# EAGLE board Qwiic_TMP117-Panel (EAGLE 9.3.0), part 1 of 2
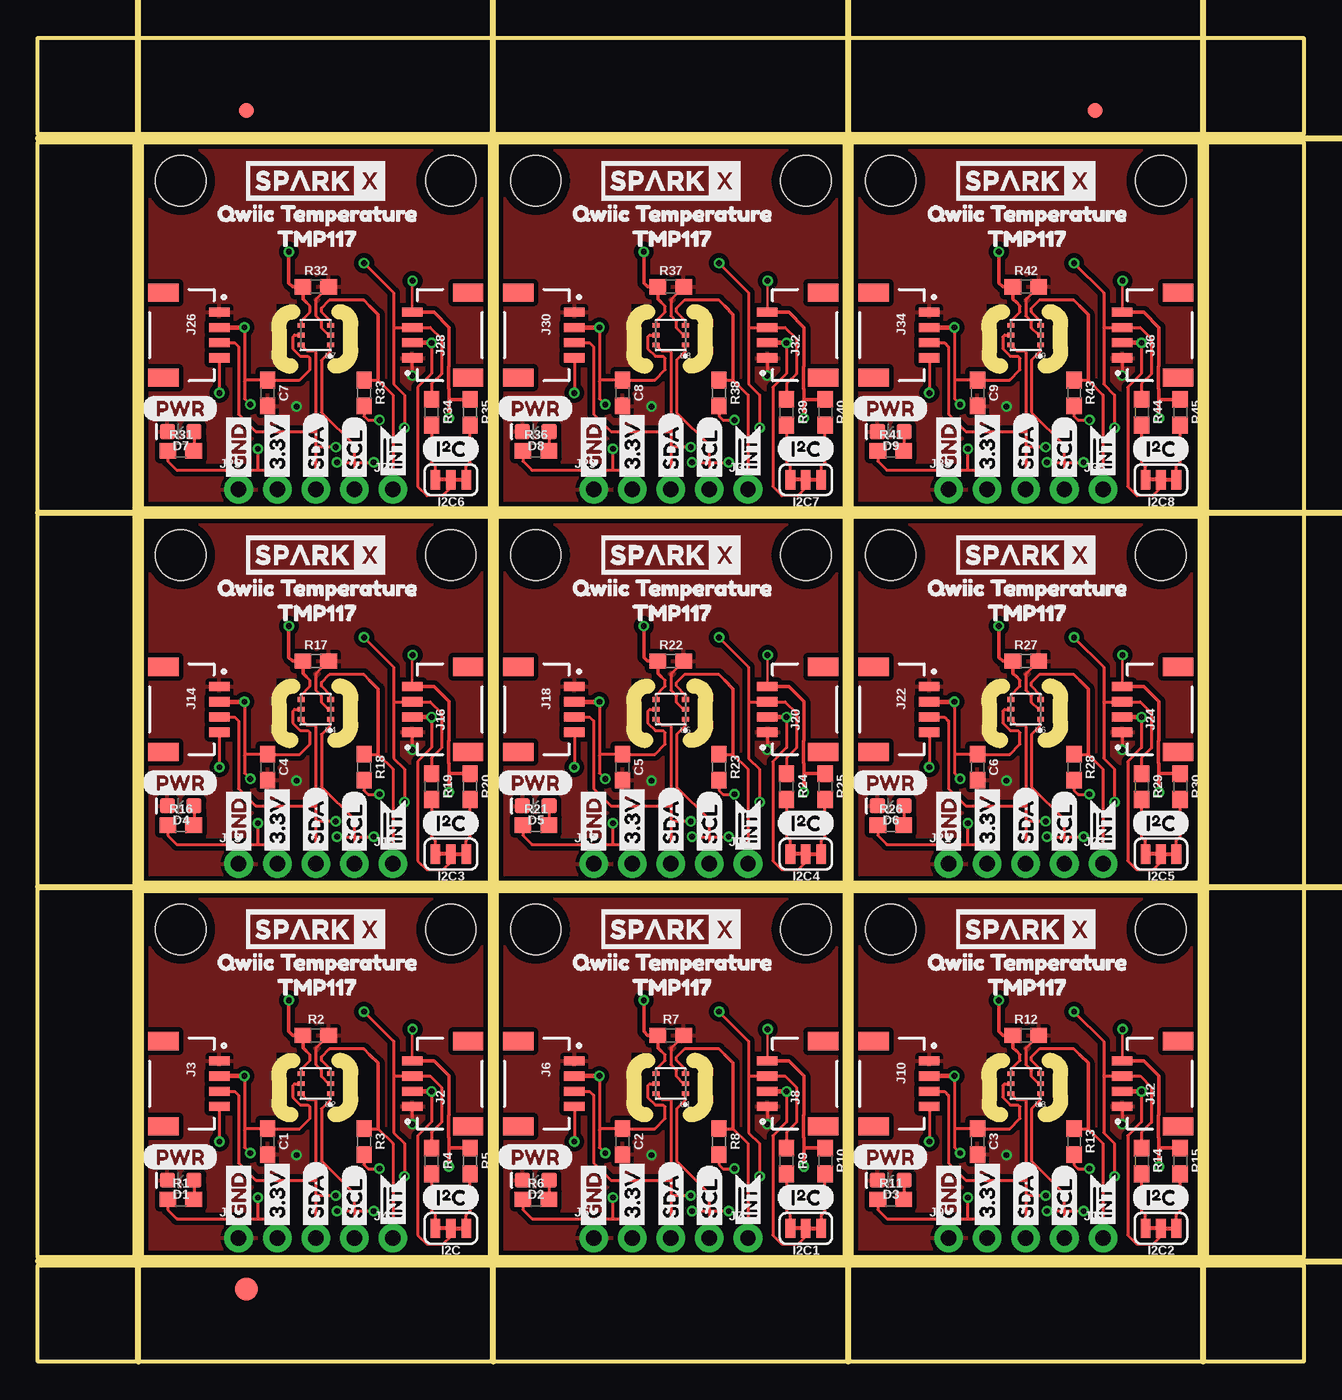
[diagram p0: board, top side]
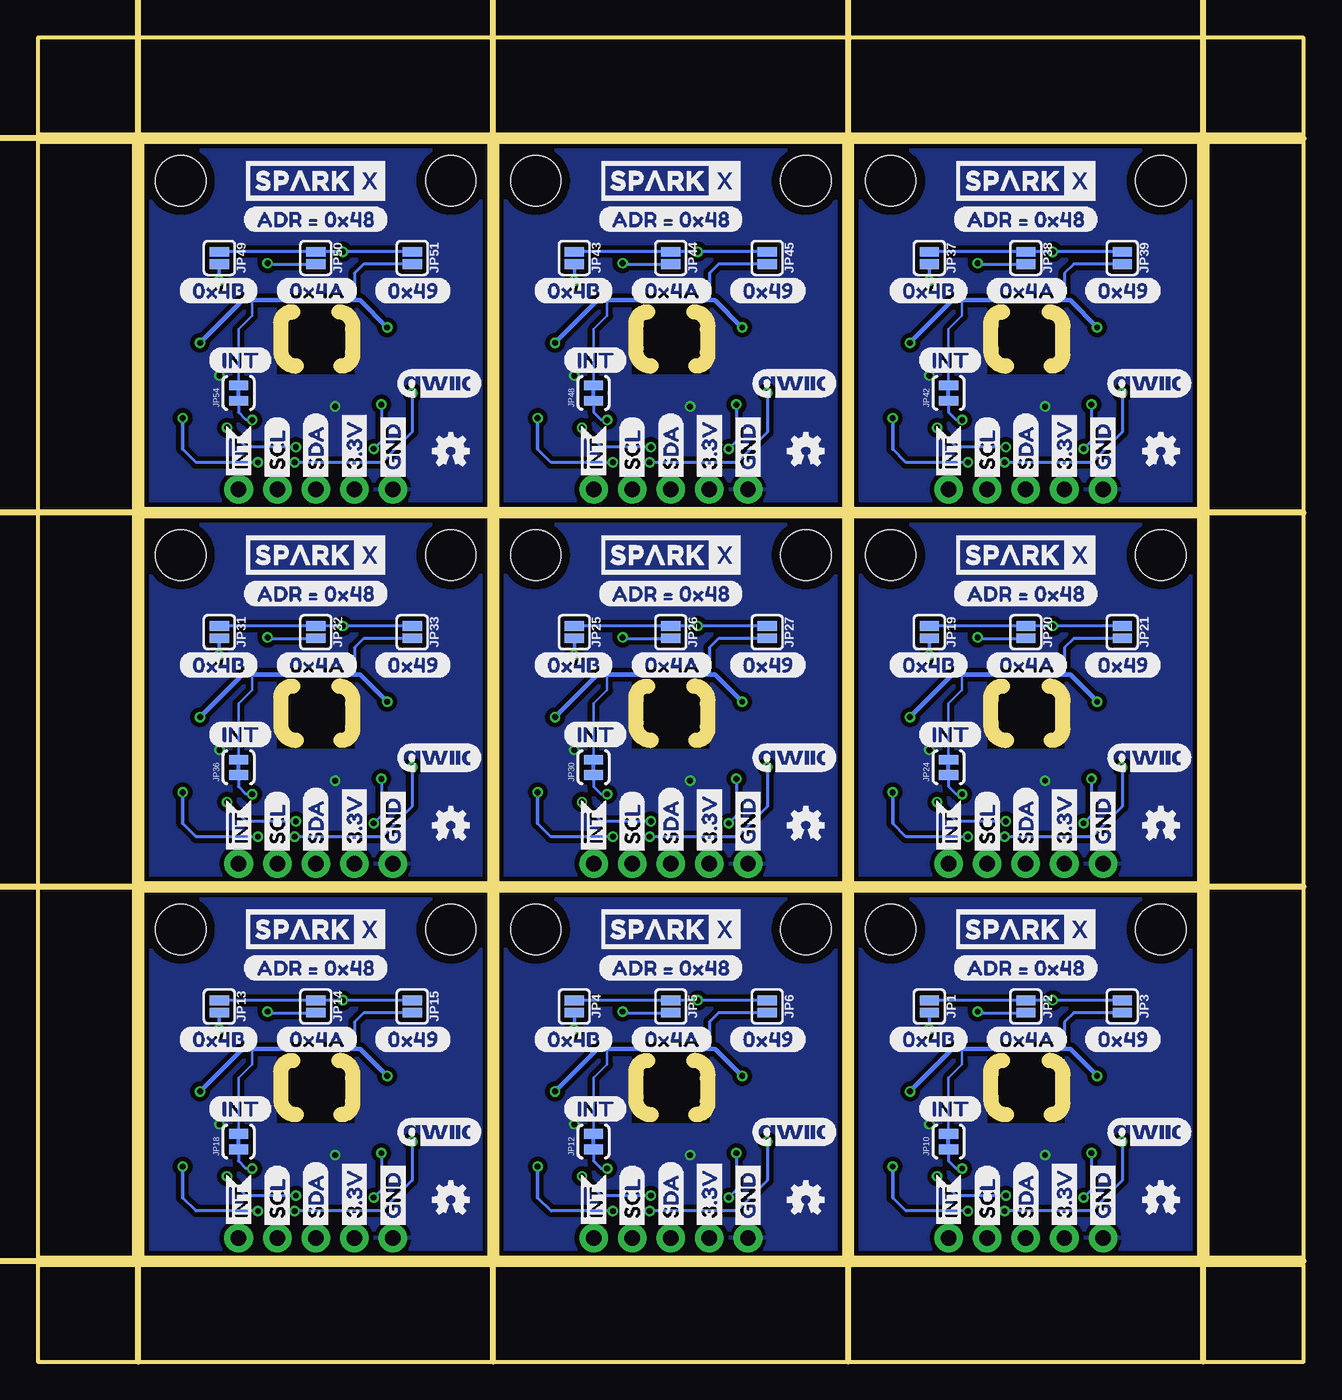
[diagram p1: board, bottom side, seen from below]

Size 83.31 x 87.12 mm. Coordinates in mm from the lower left corner, seen from the top.
Outline: 6.86,6.86 6.86,30.99 29.72,30.99 29.72,6.86 6.86,6.86
Outline: 30.23,6.86 30.23,30.99 53.09,30.99 53.09,6.86 30.23,6.86
Outline: 53.59,6.86 53.59,30.99 76.45,30.99 76.45,6.86 53.59,6.86
Outline: 6.86,31.5 6.86,55.63 29.72,55.63 29.72,31.5 6.86,31.5
Outline: 30.23,31.5 30.23,55.63 53.09,55.63 53.09,31.5 30.23,31.5
Outline: 53.59,31.5 53.59,55.63 76.45,55.63 76.45,31.5 53.59,31.5
Outline: 6.86,56.13 6.86,80.26 29.72,80.26 29.72,56.13 6.86,56.13
Outline: 30.23,56.13 30.23,80.26 53.09,80.26 53.09,56.13 30.23,56.13
Outline: 53.59,56.13 53.59,80.26 76.45,80.26 76.45,56.13 53.59,56.13
Outline: 0,6.35 83.31,6.35 83.31,0 0,0 0,6.35
Outline: 76.96,80.26 83.31,80.26 83.31,6.86 76.96,6.86 76.96,80.26
Outline: 0,87.12 83.31,87.12 83.31,80.77 0,80.77 0,87.12
Outline: 0,80.26 6.35,80.26 6.35,6.86 0,6.86 0,80.26
Copper layers (1*16): Top 0.035mm / dielectric 1.5mm / Bottom 0.035mm
Design rules "SparkFun-2-layer-PCBWay-LIMIT": minimum track width 6mil, minimum drill 0.3mm, track to track 6mil, track to pad 6mil, pad to pad 6mil, via to via 6mil, smd to smd 6mil, copper to edge 6mil, drill to drill 6mil, minimum pad ring 6mil, minimum via ring 6mil, stop-mask expansion 4mil, vias tented up to drill 25mil, thermal gap 10mil
Milling: 98 lines

## Footprints (pad centres in the part's own frame; a part is rotated, then mirrored left to right if it is on the bottom)
0603 = smd 1.1 x 1: 1 -0.85,0; 2 0.85,0
LED-0603 = smd 1 x 1: A -0.877,0; C 0.877,0
FIDUCIAL-1X2 = smd 1 x 1: 1 0,0
FIDUCIAL-1.5X3 = smd 1.5 x 1.5: 1 0,0
SMT-JUMPER_3_2-NC_TRACE_SILK = smd 0.635 x 1.27: 1 -1.016,0; 2 0,0; 3 1.016,0
1X04_NO_SILK = drill 1.016 pad 1.88: 1 0,0; 2 2.54,0; 3 5.08,0; 4 7.62,0
JST04_1MM_RA = smd 0.6 x 1.35: 1 -1.5,0; 2 -0.5,0; 3 0.5,0; 4 1.5,0 | smd 1.2 x 2: NC1 2.8,-3.675; NC2 -2.8,-3.675
1X01_NO_SILK = drill 1.016 pad 1.88: 1 0,0
SMT-JUMPER_2_NO_SILK = smd 0.635 x 1.27: 1 -0.406,0; 2 0.406,0
STAND-OFF = hole 3.302: 0,0
PAD-JUMPER-2-NC_BY_TRACE_YES_SILK = smd 0.635 x 1.27: 1 -0.508,0; 2 0.508,0
TMP117 = smd 0.45 x 0.3: 1 -0.975,0.65; 2 -0.975,0; 3 -0.975,-0.65; 4 0.975,-0.65; 5 0.975,0; 6 0.975,0.65

## Placement (x,y rotation side)
C1  0.1uF  [0603]  15.11,14.48 270 top
C2  0.1uF  [0603]  38.48,14.48 270 top
C3  0.1uF  [0603]  61.85,14.48 270 top
C4  0.1uF  [0603]  15.11,39.12 270 top
C5  0.1uF  [0603]  38.48,39.12 270 top
C6  0.1uF  [0603]  61.85,39.12 270 top
C7  0.1uF  [0603]  15.11,63.75 270 top
C8  0.1uF  [0603]  38.48,63.75 270 top
C9  0.1uF  [0603]  61.85,63.75 270 top
D1  RED  [LED-0603]  9.4,11.94 180 top
D2  RED  [LED-0603]  32.77,11.94 180 top
D3  RED  [LED-0603]  56.13,11.94 180 top
D4  RED  [LED-0603]  9.4,36.58 180 top
D5  RED  [LED-0603]  32.77,36.58 180 top
D6  RED  [LED-0603]  56.13,36.58 180 top
D7  RED  [LED-0603]  9.4,61.21 180 top
D8  RED  [LED-0603]  32.77,61.21 180 top
D9  RED  [LED-0603]  56.13,61.21 180 top
E$1  [FIDUCIAL-1X2]  13.72,82.36 0 top
E$2  [FIDUCIAL-1X2]  69.6,82.36 0 top
E$3  [FIDUCIAL-1.5X3]  13.72,4.76 0 top
I2C  [SMT-JUMPER_3_2-NC_TRACE_SILK]  27.18,8.76 180 top
I2C1  [SMT-JUMPER_3_2-NC_TRACE_SILK]  50.55,8.76 180 top
I2C2  [SMT-JUMPER_3_2-NC_TRACE_SILK]  73.91,8.76 180 top
I2C3  [SMT-JUMPER_3_2-NC_TRACE_SILK]  27.18,33.4 180 top
I2C4  [SMT-JUMPER_3_2-NC_TRACE_SILK]  50.55,33.4 180 top
I2C5  [SMT-JUMPER_3_2-NC_TRACE_SILK]  73.91,33.4 180 top
I2C6  [SMT-JUMPER_3_2-NC_TRACE_SILK]  27.18,58.04 180 top
I2C7  [SMT-JUMPER_3_2-NC_TRACE_SILK]  50.55,58.04 180 top
I2C8  [SMT-JUMPER_3_2-NC_TRACE_SILK]  73.91,58.04 180 top
J1  PTH  [1X04_NO_SILK]  13.21,8.13 0 top
J2  [JST04_1MM_RA]  24.64,18.29 90 top
J3  [JST04_1MM_RA]  11.94,18.29 270 top
J4  [1X01_NO_SILK]  23.37,8.13 0 top
J5  PTH  [1X04_NO_SILK]  36.58,8.13 0 top
J6  [JST04_1MM_RA]  35.31,18.29 270 top
J7  [1X01_NO_SILK]  46.74,8.13 0 top
J8  [JST04_1MM_RA]  48.01,18.29 90 top
J9  PTH  [1X04_NO_SILK]  59.94,8.13 0 top
J10  [JST04_1MM_RA]  58.67,18.29 270 top
J11  [1X01_NO_SILK]  70.1,8.13 0 top
J12  [JST04_1MM_RA]  71.37,18.29 90 top
J13  PTH  [1X04_NO_SILK]  13.21,32.77 0 top
J14  [JST04_1MM_RA]  11.94,42.93 270 top
J15  [1X01_NO_SILK]  23.37,32.77 0 top
J16  [JST04_1MM_RA]  24.64,42.93 90 top
J17  PTH  [1X04_NO_SILK]  36.58,32.77 0 top
J18  [JST04_1MM_RA]  35.31,42.93 270 top
J19  [1X01_NO_SILK]  46.74,32.77 0 top
J20  [JST04_1MM_RA]  48.01,42.93 90 top
J21  PTH  [1X04_NO_SILK]  59.94,32.77 0 top
J22  [JST04_1MM_RA]  58.67,42.93 270 top
J23  [1X01_NO_SILK]  70.1,32.77 0 top
J24  [JST04_1MM_RA]  71.37,42.93 90 top
J25  PTH  [1X04_NO_SILK]  13.21,57.4 0 top
J26  [JST04_1MM_RA]  11.94,67.56 270 top
J27  [1X01_NO_SILK]  23.37,57.4 0 top
J28  [JST04_1MM_RA]  24.64,67.56 90 top
J29  PTH  [1X04_NO_SILK]  36.58,57.4 0 top
J30  [JST04_1MM_RA]  35.31,67.56 270 top
J31  [1X01_NO_SILK]  46.74,57.4 0 top
J32  [JST04_1MM_RA]  48.01,67.56 90 top
J33  PTH  [1X04_NO_SILK]  59.94,57.4 0 top
J34  [JST04_1MM_RA]  58.67,67.56 270 top
J35  [1X01_NO_SILK]  70.1,57.4 0 top
J36  [JST04_1MM_RA]  71.37,67.56 90 top
JP1  [SMT-JUMPER_2_NO_SILK]  24.64,23.37 270 bottom
JP2  [SMT-JUMPER_2_NO_SILK]  18.29,23.37 270 bottom
JP3  [SMT-JUMPER_2_NO_SILK]  11.94,23.37 270 bottom
JP4  [SMT-JUMPER_2_NO_SILK]  48.01,23.37 270 bottom
JP5  [SMT-JUMPER_2_NO_SILK]  41.66,23.37 270 bottom
JP6  [SMT-JUMPER_2_NO_SILK]  35.31,23.37 270 bottom
JP7  STAND-OFF  [STAND-OFF]  50.55,28.45 0 top
JP8  STAND-OFF  [STAND-OFF]  27.18,28.45 0 top
JP9  STAND-OFF  [STAND-OFF]  9.4,28.45 0 top
JP10  INT  [PAD-JUMPER-2-NC_BY_TRACE_YES_SILK]  23.37,14.48 90 bottom
JP11  STAND-OFF  [STAND-OFF]  32.77,28.45 0 top
JP12  INT  [PAD-JUMPER-2-NC_BY_TRACE_YES_SILK]  46.74,14.48 90 bottom
JP13  [SMT-JUMPER_2_NO_SILK]  71.37,23.37 270 bottom
JP14  [SMT-JUMPER_2_NO_SILK]  65.02,23.37 270 bottom
JP15  [SMT-JUMPER_2_NO_SILK]  58.67,23.37 270 bottom
JP16  STAND-OFF  [STAND-OFF]  73.91,28.45 0 top
JP17  STAND-OFF  [STAND-OFF]  56.13,28.45 0 top
JP18  INT  [PAD-JUMPER-2-NC_BY_TRACE_YES_SILK]  70.1,14.48 90 bottom
JP19  [SMT-JUMPER_2_NO_SILK]  24.64,48.01 270 bottom
JP20  [SMT-JUMPER_2_NO_SILK]  18.29,48.01 270 bottom
JP21  [SMT-JUMPER_2_NO_SILK]  11.94,48.01 270 bottom
JP22  STAND-OFF  [STAND-OFF]  27.18,53.09 0 top
JP23  STAND-OFF  [STAND-OFF]  9.4,53.09 0 top
JP24  INT  [PAD-JUMPER-2-NC_BY_TRACE_YES_SILK]  23.37,39.12 90 bottom
JP25  [SMT-JUMPER_2_NO_SILK]  48.01,48.01 270 bottom
JP26  [SMT-JUMPER_2_NO_SILK]  41.66,48.01 270 bottom
JP27  [SMT-JUMPER_2_NO_SILK]  35.31,48.01 270 bottom
JP28  STAND-OFF  [STAND-OFF]  50.55,53.09 0 top
JP29  STAND-OFF  [STAND-OFF]  32.77,53.09 0 top
JP30  INT  [PAD-JUMPER-2-NC_BY_TRACE_YES_SILK]  46.74,39.12 90 bottom
JP31  [SMT-JUMPER_2_NO_SILK]  71.37,48.01 270 bottom
JP32  [SMT-JUMPER_2_NO_SILK]  65.02,48.01 270 bottom
JP33  [SMT-JUMPER_2_NO_SILK]  58.67,48.01 270 bottom
JP34  STAND-OFF  [STAND-OFF]  73.91,53.09 0 top
JP35  STAND-OFF  [STAND-OFF]  56.13,53.09 0 top
JP36  INT  [PAD-JUMPER-2-NC_BY_TRACE_YES_SILK]  70.1,39.12 90 bottom
JP37  [SMT-JUMPER_2_NO_SILK]  24.64,72.64 270 bottom
JP38  [SMT-JUMPER_2_NO_SILK]  18.29,72.64 270 bottom
JP39  [SMT-JUMPER_2_NO_SILK]  11.94,72.64 270 bottom
JP40  STAND-OFF  [STAND-OFF]  27.18,77.72 0 top
JP41  STAND-OFF  [STAND-OFF]  9.4,77.72 0 top
JP42  INT  [PAD-JUMPER-2-NC_BY_TRACE_YES_SILK]  23.37,63.75 90 bottom
JP43  [SMT-JUMPER_2_NO_SILK]  48.01,72.64 270 bottom
JP44  [SMT-JUMPER_2_NO_SILK]  41.66,72.64 270 bottom
JP45  [SMT-JUMPER_2_NO_SILK]  35.31,72.64 270 bottom
JP46  STAND-OFF  [STAND-OFF]  50.55,77.72 0 top
JP47  STAND-OFF  [STAND-OFF]  32.77,77.72 0 top
JP48  INT  [PAD-JUMPER-2-NC_BY_TRACE_YES_SILK]  46.74,63.75 90 bottom
JP49  [SMT-JUMPER_2_NO_SILK]  71.37,72.64 270 bottom
JP50  [SMT-JUMPER_2_NO_SILK]  65.02,72.64 270 bottom
JP51  [SMT-JUMPER_2_NO_SILK]  58.67,72.64 270 bottom
JP52  STAND-OFF  [STAND-OFF]  73.91,77.72 0 top
JP53  STAND-OFF  [STAND-OFF]  56.13,77.72 0 top
JP54  INT  [PAD-JUMPER-2-NC_BY_TRACE_YES_SILK]  70.1,63.75 90 bottom
LOGO1  OSHW-LOGOMINI  [OSHW-LOGO-MINI]  9.4,10.67 0 bottom
LOGO2  OSHW-LOGOMINI  [OSHW-LOGO-MINI]  32.77,10.67 0 bottom
LOGO3  OSHW-LOGOMINI  [OSHW-LOGO-MINI]  56.13,10.67 0 bottom
LOGO4  OSHW-LOGOMINI  [OSHW-LOGO-MINI]  9.4,35.31 0 bottom
LOGO5  OSHW-LOGOMINI  [OSHW-LOGO-MINI]  32.77,35.31 0 bottom
LOGO6  OSHW-LOGOMINI  [OSHW-LOGO-MINI]  56.13,35.31 0 bottom
LOGO7  OSHW-LOGOMINI  [OSHW-LOGO-MINI]  9.4,59.94 0 bottom
LOGO8  OSHW-LOGOMINI  [OSHW-LOGO-MINI]  32.77,59.94 0 bottom
LOGO9  OSHW-LOGOMINI  [OSHW-LOGO-MINI]  56.13,59.94 0 bottom
R1  1k  [0603]  9.4,10.67 0 top
R2  10k  [0603]  18.29,21.46 0 top
R3  10k  [0603]  21.46,14.48 270 top
R4  2.2k  [0603]  25.91,13.21 270 top
R5  2.2k  [0603]  28.45,13.21 270 top
R6  1k  [0603]  32.77,10.67 0 top
R7  10k  [0603]  41.66,21.46 0 top
R8  10k  [0603]  44.83,14.48 270 top
R9  2.2k  [0603]  49.28,13.21 270 top
R10  2.2k  [0603]  51.82,13.21 270 top
R11  1k  [0603]  56.13,10.67 0 top
R12  10k  [0603]  65.02,21.46 0 top
R13  10k  [0603]  68.2,14.48 270 top
R14  2.2k  [0603]  72.64,13.21 270 top
R15  2.2k  [0603]  75.18,13.21 270 top
R16  1k  [0603]  9.4,35.31 0 top
R17  10k  [0603]  18.29,46.1 0 top
R18  10k  [0603]  21.46,39.12 270 top
R19  2.2k  [0603]  25.91,37.85 270 top
R20  2.2k  [0603]  28.45,37.85 270 top
R21  1k  [0603]  32.77,35.31 0 top
R22  10k  [0603]  41.66,46.1 0 top
R23  10k  [0603]  44.83,39.12 270 top
R24  2.2k  [0603]  49.28,37.85 270 top
R25  2.2k  [0603]  51.82,37.85 270 top
R26  1k  [0603]  56.13,35.31 0 top
R27  10k  [0603]  65.02,46.1 0 top
R28  10k  [0603]  68.2,39.12 270 top
R29  2.2k  [0603]  72.64,37.85 270 top
R30  2.2k  [0603]  75.18,37.85 270 top
R31  1k  [0603]  9.4,59.94 0 top
R32  10k  [0603]  18.29,70.74 0 top
R33  10k  [0603]  21.46,63.75 270 top
R34  2.2k  [0603]  25.91,62.48 270 top
R35  2.2k  [0603]  28.45,62.48 270 top
R36  1k  [0603]  32.77,59.94 0 top
R37  10k  [0603]  41.66,70.74 0 top
R38  10k  [0603]  44.83,63.75 270 top
R39  2.2k  [0603]  49.28,62.48 270 top
R40  2.2k  [0603]  51.82,62.48 270 top
R41  1k  [0603]  56.13,59.94 0 top
R42  10k  [0603]  65.02,70.74 0 top
R43  10k  [0603]  68.2,63.75 270 top
R44  2.2k  [0603]  72.64,62.48 270 top
R45  2.2k  [0603]  75.18,62.48 270 top
U1  TMP117  [TMP117]  41.66,18.29 180 top
U2  TMP117  [TMP117]  18.29,18.29 180 top
U3  TMP117  [TMP117]  65.02,18.29 180 top
U4  TMP117  [TMP117]  18.29,42.93 180 top
U5  TMP117  [TMP117]  41.66,42.93 180 top
U6  TMP117  [TMP117]  65.02,42.93 180 top
U7  TMP117  [TMP117]  18.29,67.56 180 top
U8  TMP117  [TMP117]  41.66,67.56 180 top
U9  TMP117  [TMP117]  65.02,67.56 180 top
U$1  [0X4B1]  27.3,21.21 0 bottom
U$2  [SPARKX-MEDIUM]  18.29,28.45 0 bottom
U$3  [INT#-[<-04]  23.37,8.38 90 top
U$4  [TMP1171]  14.86,24.64 0 top
U$5  [0X4A0]  20.95,21.21 0 bottom
U$6  [QWIIC_TEMPERATURE2]  10.92,26.29 0 top
U$7  [INT-()-04]  25.4,16.64 0 bottom
U$8  [0X493]  14.48,21.21 0 bottom
U$9  [SCL-[)]  20.83,8.51 90 bottom
U$10  [GND-04]  13.21,8.51 90 top
U$11  [INT#-[<-04]  23.37,8.38 90 bottom
U$12  [SCL-[)]  20.83,8.51 90 top
U$13  [SDA-[)]  18.29,8.51 90 top
U$14  [SDA-[)]  18.29,8.51 90 bottom
U$15  [QWIIC_5.5MM]  10.16,15.11 0 bottom
U$16  [TMP1171]  38.23,24.64 0 top
U$17  [SPARKX-MEDIUM]  18.29,28.45 0 top
U$18  [ADR_#_0X484]  23.11,25.91 0 bottom
U$19  [3.3V]  15.75,8.51 90 top
U$20  [PWR-()-04]  6.86,13.46 0 top
U$21  [I_SUPER2_C-()-04]  25.27,10.79 0 top
U$22  [3.3V]  15.75,8.51 90 bottom
U$23  [GND-04]  13.21,8.51 90 bottom
U$24  [QWIIC_TEMPERATURE2]  34.29,26.29 0 top
U$25  [SPARKX-MEDIUM]  41.66,28.45 0 bottom
U$26  [SPARKX-MEDIUM]  41.66,28.45 0 top
U$27  [INT#-[<-04]  46.74,8.38 90 top
U$28  [INT-()-04]  48.77,16.64 0 bottom
U$29  [SCL-[)]  44.2,8.51 90 bottom
U$30  [INT#-[<-04]  46.74,8.38 90 bottom
U$31  [PWR-()-04]  30.23,13.46 0 top
U$32  [I_SUPER2_C-()-04]  48.64,10.79 0 top
U$33  [3.3V]  39.12,8.51 90 top
U$34  [3.3V]  39.12,8.51 90 bottom
U$35  [GND-04]  36.58,8.51 90 bottom
U$36  [GND-04]  36.58,8.51 90 top
U$37  [SCL-[)]  44.2,8.51 90 top
U$38  [SDA-[)]  41.66,8.51 90 top
U$39  [SDA-[)]  41.66,8.51 90 bottom
U$40  [0X4B1]  50.67,21.21 0 bottom
U$41  [0X4A0]  44.32,21.21 0 bottom
U$42  [0X493]  37.85,21.21 0 bottom
U$43  [ADR_#_0X484]  46.48,25.91 0 bottom
U$44  [QWIIC_5.5MM]  33.53,15.11 0 bottom
U$45  [TMP1171]  61.59,24.64 0 top
U$46  [QWIIC_TEMPERATURE2]  57.66,26.29 0 top
U$47  [SPARKX-MEDIUM]  65.02,28.45 0 bottom
U$48  [SPARKX-MEDIUM]  65.02,28.45 0 top
U$49  [INT#-[<-04]  70.1,8.38 90 top
U$50  [INT-()-04]  72.14,16.64 0 bottom
U$51  [SCL-[)]  67.56,8.51 90 bottom
U$52  [INT#-[<-04]  70.1,8.38 90 bottom
U$53  [PWR-()-04]  53.59,13.46 0 top
U$54  [I_SUPER2_C-()-04]  72.01,10.79 0 top
U$55  [3.3V]  62.48,8.51 90 top
U$56  [3.3V]  62.48,8.51 90 bottom
U$57  [GND-04]  59.94,8.51 90 bottom
U$58  [GND-04]  59.94,8.51 90 top
U$59  [SCL-[)]  67.56,8.51 90 top
U$60  [SDA-[)]  65.02,8.51 90 top
U$61  [SDA-[)]  65.02,8.51 90 bottom
U$62  [0X4B1]  74.04,21.21 0 bottom
U$63  [0X4A0]  67.69,21.21 0 bottom
U$64  [0X493]  61.21,21.21 0 bottom
U$65  [ADR_#_0X484]  69.85,25.91 0 bottom
U$66  [QWIIC_5.5MM]  56.9,15.11 0 bottom
U$67  [TMP1171]  14.86,49.28 0 top
U$68  [QWIIC_TEMPERATURE2]  10.92,50.93 0 top
U$69  [SPARKX-MEDIUM]  18.29,53.09 0 bottom
U$70  [SPARKX-MEDIUM]  18.29,53.09 0 top
U$71  [INT#-[<-04]  23.37,33.02 90 top
U$72  [INT-()-04]  25.4,41.27 0 bottom
U$73  [SCL-[)]  20.83,33.15 90 bottom
U$74  [INT#-[<-04]  23.37,33.02 90 bottom
U$75  [PWR-()-04]  6.86,38.1 0 top
U$76  [I_SUPER2_C-()-04]  25.27,35.43 0 top
U$77  [3.3V]  15.75,33.15 90 top
U$78  [3.3V]  15.75,33.15 90 bottom
U$79  [GND-04]  13.21,33.15 90 bottom
U$80  [GND-04]  13.21,33.15 90 top
U$81  [SCL-[)]  20.83,33.15 90 top
U$82  [SDA-[)]  18.29,33.15 90 top
U$83  [SDA-[)]  18.29,33.15 90 bottom
U$84  [0X4B1]  27.3,45.85 0 bottom
U$85  [0X4A0]  20.95,45.85 0 bottom
U$86  [0X493]  14.48,45.85 0 bottom
U$87  [ADR_#_0X484]  23.11,50.55 0 bottom
U$88  [QWIIC_5.5MM]  10.16,39.75 0 bottom
U$89  [TMP1171]  38.23,49.28 0 top
U$90  [QWIIC_TEMPERATURE2]  34.29,50.93 0 top
U$91  [SPARKX-MEDIUM]  41.66,53.09 0 bottom
U$92  [SPARKX-MEDIUM]  41.66,53.09 0 top
U$93  [INT#-[<-04]  46.74,33.02 90 top
U$94  [INT-()-04]  48.77,41.27 0 bottom
U$95  [SCL-[)]  44.2,33.15 90 bottom
U$96  [INT#-[<-04]  46.74,33.02 90 bottom
U$97  [PWR-()-04]  30.23,38.1 0 top
U$98  [I_SUPER2_C-()-04]  48.64,35.43 0 top
U$99  [3.3V]  39.12,33.15 90 top
U$100  [3.3V]  39.12,33.15 90 bottom
U$101  [GND-04]  36.58,33.15 90 bottom
U$102  [GND-04]  36.58,33.15 90 top
U$103  [SCL-[)]  44.2,33.15 90 top
U$104  [SDA-[)]  41.66,33.15 90 top
U$105  [SDA-[)]  41.66,33.15 90 bottom
U$106  [0X4B1]  50.67,45.85 0 bottom
U$107  [0X4A0]  44.32,45.85 0 bottom
U$108  [0X493]  37.85,45.85 0 bottom
U$109  [ADR_#_0X484]  46.48,50.55 0 bottom
U$110  [QWIIC_5.5MM]  33.53,39.75 0 bottom
U$111  [TMP1171]  61.59,49.28 0 top
U$112  [QWIIC_TEMPERATURE2]  57.66,50.93 0 top
U$113  [SPARKX-MEDIUM]  65.02,53.09 0 bottom
U$114  [SPARKX-MEDIUM]  65.02,53.09 0 top
U$115  [INT#-[<-04]  70.1,33.02 90 top
U$116  [INT-()-04]  72.14,41.27 0 bottom
U$117  [SCL-[)]  67.56,33.15 90 bottom
U$118  [INT#-[<-04]  70.1,33.02 90 bottom
U$119  [PWR-()-04]  53.59,38.1 0 top
U$120  [I_SUPER2_C-()-04]  72.01,35.43 0 top
U$121  [3.3V]  62.48,33.15 90 top
U$122  [3.3V]  62.48,33.15 90 bottom
U$123  [GND-04]  59.94,33.15 90 bottom
U$124  [GND-04]  59.94,33.15 90 top
U$125  [SCL-[)]  67.56,33.15 90 top
U$126  [SDA-[)]  65.02,33.15 90 top
U$127  [SDA-[)]  65.02,33.15 90 bottom
U$128  [0X4B1]  74.04,45.85 0 bottom
U$129  [0X4A0]  67.69,45.85 0 bottom
U$130  [0X493]  61.21,45.85 0 bottom
U$131  [ADR_#_0X484]  69.85,50.55 0 bottom
U$132  [QWIIC_5.5MM]  56.9,39.75 0 bottom
U$133  [TMP1171]  14.86,73.91 0 top
U$134  [QWIIC_TEMPERATURE2]  10.92,75.56 0 top
U$135  [SPARKX-MEDIUM]  18.29,77.72 0 bottom
U$136  [SPARKX-MEDIUM]  18.29,77.72 0 top
U$137  [INT#-[<-04]  23.37,57.66 90 top
U$138  [INT-()-04]  25.4,65.91 0 bottom
U$139  [SCL-[)]  20.83,57.78 90 bottom
U$140  [INT#-[<-04]  23.37,57.66 90 bottom
U$141  [PWR-()-04]  6.86,62.74 0 top
U$142  [I_SUPER2_C-()-04]  25.27,60.07 0 top
U$143  [3.3V]  15.75,57.78 90 top
U$144  [3.3V]  15.75,57.78 90 bottom
U$145  [GND-04]  13.21,57.78 90 bottom
U$146  [GND-04]  13.21,57.78 90 top
U$147  [SCL-[)]  20.83,57.78 90 top
U$148  [SDA-[)]  18.29,57.78 90 top
U$149  [SDA-[)]  18.29,57.78 90 bottom
U$150  [0X4B1]  27.3,70.48 0 bottom
U$151  [0X4A0]  20.95,70.48 0 bottom
U$152  [0X493]  14.48,70.48 0 bottom
U$153  [ADR_#_0X484]  23.11,75.18 0 bottom
U$154  [QWIIC_5.5MM]  10.16,64.39 0 bottom
U$155  [TMP1171]  38.23,73.91 0 top
U$156  [QWIIC_TEMPERATURE2]  34.29,75.56 0 top
U$157  [SPARKX-MEDIUM]  41.66,77.72 0 bottom
U$158  [SPARKX-MEDIUM]  41.66,77.72 0 top
U$159  [INT#-[<-04]  46.74,57.66 90 top
U$160  [INT-()-04]  48.77,65.91 0 bottom
U$161  [SCL-[)]  44.2,57.78 90 bottom
U$162  [INT#-[<-04]  46.74,57.66 90 bottom
U$163  [PWR-()-04]  30.23,62.74 0 top
U$164  [I_SUPER2_C-()-04]  48.64,60.07 0 top
U$165  [3.3V]  39.12,57.78 90 top
U$166  [3.3V]  39.12,57.78 90 bottom
U$167  [GND-04]  36.58,57.78 90 bottom
U$168  [GND-04]  36.58,57.78 90 top
U$169  [SCL-[)]  44.2,57.78 90 top
U$170  [SDA-[)]  41.66,57.78 90 top
U$171  [SDA-[)]  41.66,57.78 90 bottom
U$172  [0X4B1]  50.67,70.48 0 bottom
U$173  [0X4A0]  44.32,70.48 0 bottom
U$174  [0X493]  37.85,70.48 0 bottom
U$175  [ADR_#_0X484]  46.48,75.18 0 bottom
U$176  [QWIIC_5.5MM]  33.53,64.39 0 bottom
U$177  [TMP1171]  61.59,73.91 0 top
U$178  [QWIIC_TEMPERATURE2]  57.66,75.56 0 top
U$179  [SPARKX-MEDIUM]  65.02,77.72 0 bottom
U$180  [SPARKX-MEDIUM]  65.02,77.72 0 top
U$181  [INT#-[<-04]  70.1,57.66 90 top
U$182  [INT-()-04]  72.14,65.91 0 bottom
U$183  [SCL-[)]  67.56,57.78 90 bottom
U$184  [INT#-[<-04]  70.1,57.66 90 bottom
U$185  [PWR-()-04]  53.59,62.74 0 top
U$186  [I_SUPER2_C-()-04]  72.01,60.07 0 top
U$187  [3.3V]  62.48,57.78 90 top
U$188  [3.3V]  62.48,57.78 90 bottom
U$189  [GND-04]  59.94,57.78 90 bottom
U$190  [GND-04]  59.94,57.78 90 top
U$191  [SCL-[)]  67.56,57.78 90 top
U$192  [SDA-[)]  65.02,57.78 90 top
U$193  [SDA-[)]  65.02,57.78 90 bottom
U$194  [0X4B1]  74.04,70.48 0 bottom
U$195  [0X4A0]  67.69,70.48 0 bottom
U$196  [0X493]  61.21,70.48 0 bottom
U$197  [ADR_#_0X484]  69.85,75.18 0 bottom
U$198  [QWIIC_5.5MM]  56.9,64.39 0 bottom

## Library data of the parts
C1-C9 = SparkFun-Capacitors; PROD_ID: CAP-00810
D1-D9 = SparkFun-LED; PROD_ID: DIO-00819
E$1 E$2 LOGO1-LOGO9 U$15 U$44 U$66 U$88 U$110 U$132 U$154 U$176 U$198 = SparkFun-Aesthetics
E$3 = SparkFun-Retired
I2C I2C1-I2C8 JP1-JP6 JP13-JP15 JP19-JP21 JP25-JP27 JP31-JP33 JP37-JP39 JP43-JP45 JP49-JP51 = SparkFun-Jumpers
J1 J5 J9 J13 J17 J21 J25 J29 J33 U$2 U$17 U$25 U$26 U$47 U$48 U$69 U$70 U$91 U$92 U$113 U$114 U$135 U$136 U$157 U$158 U$179 U$180 = SparkX
J2 J3 J6 J8 J10 J12 J14 J16 J18 J20 J22 J24 J26 J28 J30 J32 J34 J36 = SparkFun-Connectors; PROD_ID: CONN-13694
J4 J7 J11 J15 J19 J23 J27 J31 J35 = SparkFun-Connectors
JP7-JP9 JP11 JP16 JP17 JP22 JP23 JP28 JP29 JP34 JP35 JP40 JP41 JP46 JP47 JP52 JP53 = SparkFun
JP10 JP12 JP18 JP24 JP30 JP36 JP42 JP48 JP54 = SparkFun-Passives
R1 R6 R11 R16 R21 R26 R31 R36 R41 = SparkFun-Resistors; PROD_ID: RES-07856
R2 R3 R7 R8 R12 R13 R17 R18 R22 R23 R27 R28 R32 R33 R37 R38 R42 R43 = SparkFun-Resistors; PROD_ID: RES-00824
R4 R5 R9 R10 R14 R15 R19 R20 R24 R25 R29 R30 R34 R35 R39 R40 R44 R45 = SparkFun-Resistors; PROD_ID: RES-08272
U1-U9 = TMP117
U$1 U$5 U$8 U$18 U$40-U$43 U$62-U$65 U$84-U$87 U$106-U$109 U$128-U$131 U$150-U$153 U$172-U$175 U$194-U$197 = buzzard_labels (15)
U$3 U$7 U$9-U$14 U$19-U$23 U$27-U$39 U$49-U$61 U$71-U$83 U$93-U$105 U$115-U$127 U$137-U$149 U$159-U$171 U$181-U$193 = Labels
U$4 U$16 U$45 U$67 U$89 U$111 U$133 U$155 U$177 = buzzard_labels
U$6 U$24 U$46 U$68 U$90 U$112 U$134 U$156 U$178 = buzzard_labels (2)

## Nets
3.3V: C1.1 I2C.2 J1.2 J2.2 J3.2 JP3.2 JP10.2 R1.1 U2.5
3.3V1: C2.1 I2C1.2 J5.2 J6.2 J8.2 JP6.2 JP12.2 R6.1 U1.5
3.3V2: C3.1 I2C2.2 J9.2 J10.2 J12.2 JP15.2 JP18.2 R11.1 U3.5
3.3V3: C4.1 I2C3.2 J13.2 J14.2 J16.2 JP21.2 JP24.2 R16.1 U4.5
3.3V4: C5.1 I2C4.2 J17.2 J18.2 J20.2 JP27.2 JP30.2 R21.1 U5.5
3.3V5: C6.1 I2C5.2 J21.2 J22.2 J24.2 JP33.2 JP36.2 R26.1 U6.5
3.3V6: C7.1 I2C6.2 J25.2 J26.2 J28.2 JP39.2 JP42.2 R31.1 U7.5
3.3V7: C8.1 I2C7.2 J29.2 J30.2 J32.2 JP45.2 JP48.2 R36.1 U8.5
3.3V8: C9.1 I2C8.2 J33.2 J34.2 J36.2 JP51.2 JP54.2 R41.1 U9.5
!INT: J4.1 R3.1 U2.3
!INT1: J7.1 R8.1 U1.3
!INT2: J11.1 R13.1 U3.3
!INT3: J15.1 R18.1 U4.3
!INT4: J19.1 R23.1 U5.3
!INT5: J23.1 R28.1 U6.3
!INT6: J27.1 R33.1 U7.3
!INT7: J31.1 R38.1 U8.3
!INT8: J35.1 R43.1 U9.3
ADD0: JP1.1 JP2.1 JP3.1 R2.1 U2.4
ADD1: JP4.1 JP5.1 JP6.1 R7.1 U1.4
ADD2: JP13.1 JP14.1 JP15.1 R12.1 U3.4
ADD3: JP19.1 JP20.1 JP21.1 R17.1 U4.4
ADD4: JP25.1 JP26.1 JP27.1 R22.1 U5.4
ADD5: JP31.1 JP32.1 JP33.1 R27.1 U6.4
ADD6: JP37.1 JP38.1 JP39.1 R32.1 U7.4
ADD7: JP43.1 JP44.1 JP45.1 R37.1 U8.4
ADD8: JP49.1 JP50.1 JP51.1 R42.1 U9.4
GND: C1.2 D1.C J1.1 J2.1 J3.1 R2.2 U2.2
GND1: C2.2 D2.C J5.1 J6.1 J8.1 R7.2 U1.2
GND2: C3.2 D3.C J9.1 J10.1 J12.1 R12.2 U3.2
GND3: C4.2 D4.C J13.1 J14.1 J16.1 R17.2 U4.2
GND4: C5.2 D5.C J17.1 J18.1 J20.1 R22.2 U5.2
GND5: C6.2 D6.C J21.1 J22.1 J24.1 R27.2 U6.2
GND6: C7.2 D7.C J25.1 J26.1 J28.1 R32.2 U7.2
GND7: C8.2 D8.C J29.1 J30.1 J32.1 R37.2 U8.2
GND8: C9.2 D9.C J33.1 J34.1 J36.1 R42.2 U9.2
N$1: D1.A R1.2
N$2: I2C.1 R5.2
N$3: I2C.3 R4.2
N$4: JP10.1 R3.2
N$7: D2.A R6.2
N$8: I2C1.1 R10.2
N$9: I2C1.3 R9.2
N$10: JP12.1 R8.2
N$13: D3.A R11.2
N$14: I2C2.1 R15.2
N$15: I2C2.3 R14.2
N$16: JP18.1 R13.2
N$19: D4.A R16.2
N$20: I2C3.1 R20.2
N$21: I2C3.3 R19.2
N$22: JP24.1 R18.2
N$25: D5.A R21.2
N$26: I2C4.1 R25.2
N$27: I2C4.3 R24.2
N$28: JP30.1 R23.2
N$31: D6.A R26.2
N$32: I2C5.1 R30.2
N$33: I2C5.3 R29.2
N$34: JP36.1 R28.2
N$37: D7.A R31.2
N$38: I2C6.1 R35.2
N$39: I2C6.3 R34.2
N$40: JP42.1 R33.2
N$43: D8.A R36.2
N$44: I2C7.1 R40.2
N$45: I2C7.3 R39.2
N$46: JP48.1 R38.2
N$49: D9.A R41.2
N$50: I2C8.1 R45.2
N$51: I2C8.3 R44.2
N$52: JP54.1 R43.2
SCL: J1.4 J2.4 J3.4 JP1.2 R5.1 U2.1
SCL1: J5.4 J6.4 J8.4 JP4.2 R10.1 U1.1
SCL2: J9.4 J10.4 J12.4 JP13.2 R15.1 U3.1
SCL3: J13.4 J14.4 J16.4 JP19.2 R20.1 U4.1
SCL4: J17.4 J18.4 J20.4 JP25.2 R25.1 U5.1
SCL5: J21.4 J22.4 J24.4 JP31.2 R30.1 U6.1
SCL6: J25.4 J26.4 J28.4 JP37.2 R35.1 U7.1
SCL7: J29.4 J30.4 J32.4 JP43.2 R40.1 U8.1
SCL8: J33.4 J34.4 J36.4 JP49.2 R45.1 U9.1
SDA: J1.3 J2.3 J3.3 JP2.2 R4.1 U2.6
SDA1: J5.3 J6.3 J8.3 JP5.2 R9.1 U1.6
SDA2: J9.3 J10.3 J12.3 JP14.2 R14.1 U3.6
SDA3: J13.3 J14.3 J16.3 JP20.2 R19.1 U4.6
SDA4: J17.3 J18.3 J20.3 JP26.2 R24.1 U5.6
SDA5: J21.3 J22.3 J24.3 JP32.2 R29.1 U6.6
SDA6: J25.3 J26.3 J28.3 JP38.2 R34.1 U7.6
SDA7: J29.3 J30.3 J32.3 JP44.2 R39.1 U8.6
SDA8: J33.3 J34.3 J36.3 JP50.2 R44.1 U9.6